# EAGLE board MintyBoost XL (EAGLE 5.11)
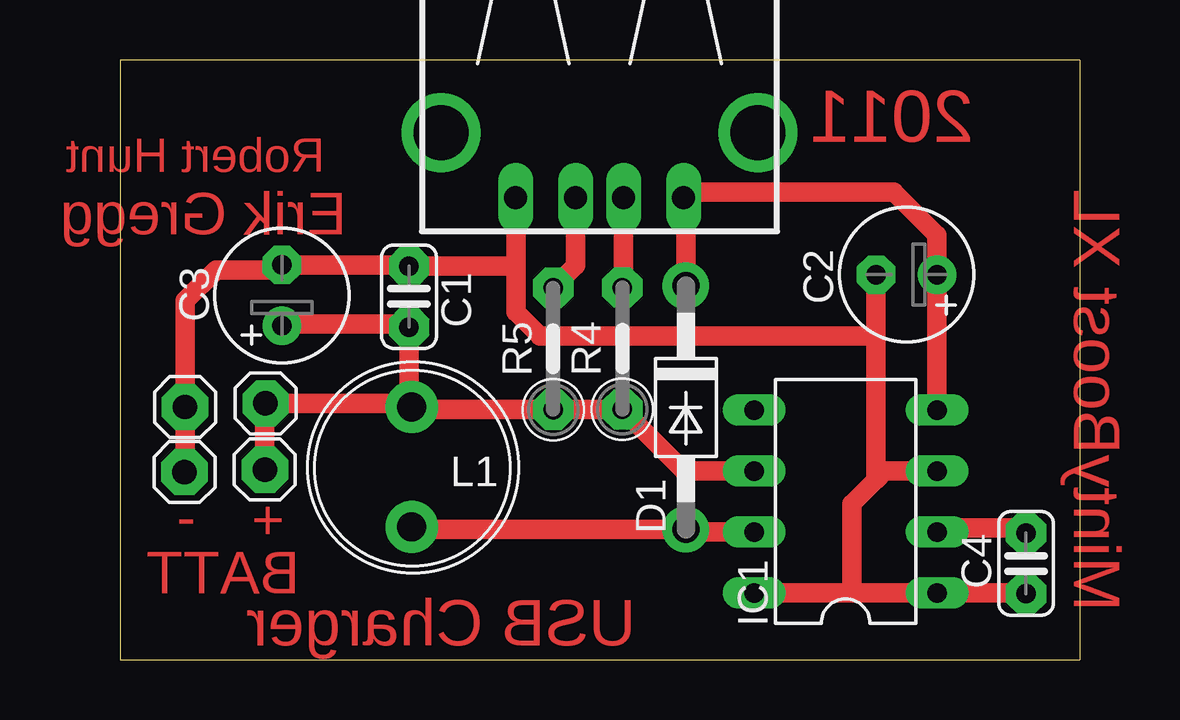
[diagram p0: board, top side]

Size 40 x 25 mm. Coordinates in mm from the lower left corner, seen from the top.
Outline: 0,0 40,0 40,25 0,25 0,0
Copper layers (1*16): Top 0.035mm / dielectric 1.5mm / Bottom 0.035mm
Design rules "default": minimum track width 10mil, minimum drill 24mil, track to track 8mil, track to pad 8mil, pad to pad 8mil, via to via 8mil, smd to smd 8mil, copper to edge 40mil, drill to drill 8mil, minimum pad ring 10mil, minimum via ring 8mil, stop-mask expansion 4mil, vias tented up to drill 0mil, thermal gap 10mil

## Footprints (pad centres in the part's own frame; a part is rotated, then mirrored left to right if it is on the bottom)
1X01 = drill 1.016 pad 1.93 octagon: 1 0,0
C025-024X044 = drill 0.813 pad 1.676 octagon: 1 -1.27,0; 2 1.27,0
E2,5-6 = drill 0.813 pad 1.6 round: + -1.27,0 | drill 0.813 pad 1.6 octagon: - 1.27,0
DO41-10 = drill 1.118 pad 1.93 round: A 5.08,0; C -5.08,0
DIL08 = drill 0.813 long: 1 -3.81,-3.81; 2 -1.27,-3.81; 3 1.27,-3.81; 4 3.81,-3.81; 5 3.81,3.81; 6 1.27,3.81; 7 -1.27,3.81; 8 -3.81,3.81
6000 = drill 1.2 pad 2.184 round: 1 -2.5,0; 2 2.5,0
0207/5V = drill 0.813 pad 1.676 octagon: 1 -2.54,0; 2 2.54,0
PN87520 = drill 0.95 long: 1 -3.5,2.71; 2 -1,2.71; 3 1,2.71; 4 3.5,2.71 | drill 2.286 round: P$1 -6.604,0; P$2 6.604,0

## Placement (x,y rotation side)
+  [1X01]  6.07,10.68 0 top
+1  [1X01]  6.04,7.92 0 top
-  [1X01]  2.71,10.53 0 top
-1  [1X01]  2.69,7.82 0 top
C1  0.1uF  [C025-024X044]  12.05,15.13 90 top
C2  220uF  [E2,5-6]  32.79,16.05 180 top
C3  220uF  [E2,5-6]  6.75,15.18 90 top
C4  0.1uF  [C025-024X044]  37.77,4.01 270 top
D1  1N5817  [DO41-10]  23.59,10.51 270 top
IC1  LT1302  [DIL08]  30.25,6.59 90 top
L1  22uH  [6000]  12.16,8.03 270 top
R4  15K  [0207/5V]  20.94,12.97 90 top
R5  15K  [0207/5V]  18.06,12.96 90 top
X1  [PN87520]  19.99,21.97 180 top

## Library data of the parts
+ +1 - -1 = pinhead-ez
C1-C4 R4 R5 = rcl-ez
D1 IC1 L1 = usbbuck
X1 = con-berg

## Nets
+5V: C2.+ D1.C IC1.4 X1.1
BATT+: +1.1 +.1 C1.1 C3.+ IC1.6 L1.1 R4.1 R5.1
D+: R5.2 X1.3
D-: R4.2 X1.2
GND: -1.1 -.1 C1.2 C2.- C3.- C4.2 IC1.1 IC1.3 IC1.8 X1.4
N$1: C4.1 IC1.2
N$5: D1.A IC1.7 L1.2

## Tracks (layer width: path | path; a pad name or v marks a point on that pad's centre or on a via)
+5V
  Top 0.813: IC1.4 C2.+ 34.06,17.69 32.25,19.5 23.73,19.5 X1.1 23.59,19.16 D1.C
BATT+
  Top 0.813: IC1.6 23.51,7.86 R4.1 R5.1 12.27,10.42 L1.1 | L1.1 12.05,10.64 C1.1 12.05,13.95 12,14 6.84,14 C3.+ | L1.1 12.01,10.68 +.1 6.04,10.65 +1.1
D+
  Top 0.813: X1.3 18.99,16.43 R5.2
D-
  Top 0.813: X1.2 20.99,15.56 R4.2
GND
  Top 0.813: IC1.1 IC1.8 | IC1.1 37.77,2.78 C4.2 | IC1.1 30.5,2.78 30.5,6.5 31.5,7.5 | 31.5,7.5 31.86,7.86 IC1.3 | C2.- 31.5,16.03 31.5,13.5 | 31.5,13.5 31.5,7.5 | X1.4 16.5,16.25 | 16.5,16.25 16.5,14.5 17.5,13.5 31.5,13.5 | 16.5,16.25 16.35,16.4 C1.2 12,16.45 C3.- 6.55,16.25 4,16.25 2.71,14.96 -.1 2.71,7.84 -1.1
N$1
  Top 0.813: C4.1 37.5,5.28 37.5,5.5 34.06,5.5 IC1.2
N$5
  Top 0.813: IC1.7 23.7,5.32 D1.A 12.26,5.43 L1.2

## Text on the board
Top: 2011 | Robert Hunt | Erik Gregg | BATT | USB Charger | MintyBoost XL